# EAGLE board 2LD-17-mk-1.4.2 (EAGLE 7.5.0)
VERSION: v1.4
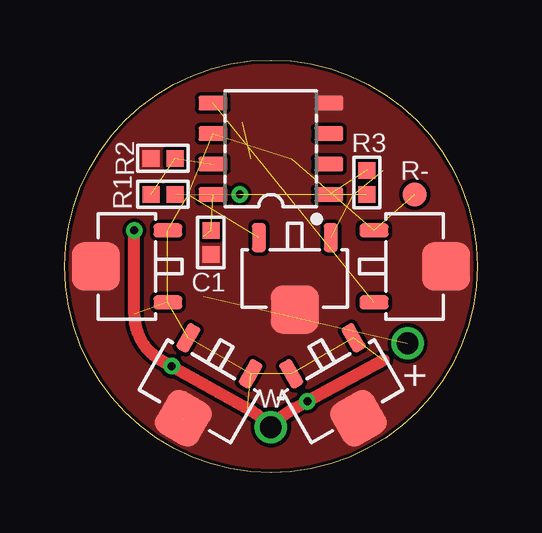
[diagram p0: board, top side]
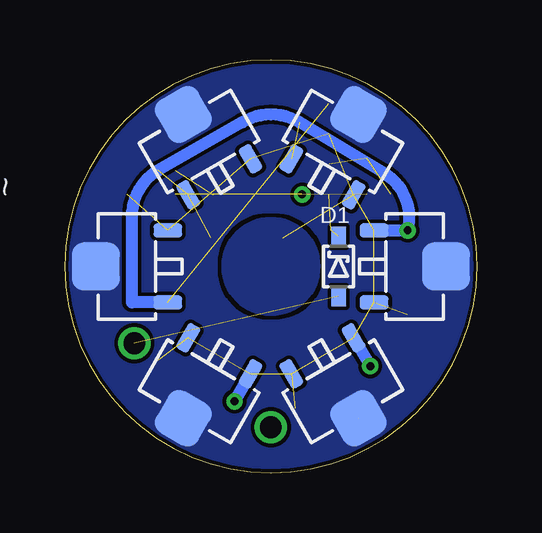
[diagram p1: board, bottom side, seen from below]

Size 17.2 x 17.2 mm. Coordinates in mm from the lower left corner, seen from the top.
Outline: 0,8.6 arc-180 17.2,8.6 arc-180 0,8.6
Copper layers (1*16): Top 0.0356mm / dielectric 1.5011mm / Bottom 0.0356mm
Design rules "LaenPCBOrder2": minimum track width 6mil, minimum drill 13mil, track to track 6mil, track to pad 6mil, pad to pad 6mil, via to via 6mil, smd to smd 6mil, copper to edge 6mil, drill to drill 6mil, minimum pad ring 7mil, minimum via ring 7mil, stop-mask expansion 3mil, vias tented up to drill 20mil, thermal gap 10mil

## Footprints (pad centres in the part's own frame; a part is rotated, then mirrored left to right if it is on the bottom)
1X01-0.9MM-CIR = drill 0.9 pad 1.3: P$1 0,0
C0402 = smd 0.7 x 0.7: 1 -0.5,0; 2 0.5,0
SOD323-SCHOTTKY = smd 0.8 x 0.6: A -1.25,0; C 1.25,0
R0402 = smd 0.7 x 0.7: 1 -0.5,0; 2 0.5,0
1X01-SMD-1MM-DIA-NS = smd 1 x 1: P$1 0,0
SO08-NARROWER = smd 0.6 x 1.2: 1 -1.905,-2.416; 2 -0.635,-2.416; 3 0.635,-2.416; 4 1.905,-2.416; 5 1.905,2.416; 6 0.635,2.416; 7 -0.635,2.416; 8 -1.905,2.416
SOT89-NOTHERM-ROUNDED-LESS = smd 0.58 x 1.2: 1 -1.5,-1.7; 3 1.5,-1.7 | smd 2 x 2: 4 0,1.3

## Placement (x,y rotation side)
+  M011X01-0.9MM-CIR  [1X01-0.9MM-CIR]  14.3,5.4 90 top
C1  1u  [C0402]  6.1,9.6 270 top
D1  BAT165  [SOD323-SCHOTTKY]  5.78,8.6 90 bottom
FRAME1  FRAME-LETTERNO_PACKAGE  [DUMMY]  0.1,0.1 0 top
R1  19K  [R0402]  4.1,11.6 0 top
R2  4K7  [R0402]  4.1,13.1 0 top
R3  10K  [R0402]  12.6,12.1 270 top
R-  M01SMD-1MM-DIA-NS  [1X01-SMD-1MM-DIA-NS]  14.6,11.6 90 top
U1  Tiny25  [SO08-NARROWER]  8.6,13.5 90 top
U2  AMC7135  [SOT89-NOTHERM-ROUNDED-LESS]  2.6,8.6 90 top
U3  AMC7135  [SOT89-NOTHERM-ROUNDED-LESS]  11.6,13.8 30 bottom
U4  AMC7135  [SOT89-NOTHERM-ROUNDED-LESS]  5.6,13.8 330 bottom
U5  AMC7135  [SOT89-NOTHERM-ROUNDED-LESS]  2.6,8.6 270 bottom
U6  AMC7135  [SOT89-NOTHERM-ROUNDED-LESS]  5.6,3.4 210 bottom
U7  AMC7135  [SOT89-NOTHERM-ROUNDED-LESS]  11.6,3.4 150 bottom
U8  AMC7135  [SOT89-NOTHERM-ROUNDED-LESS]  14.6,8.6 90 bottom
U9  AMC7135  [SOT89-NOTHERM-ROUNDED-LESS]  9.6,8.1 180 top
U10  AMC7135  [SOT89-NOTHERM-ROUNDED-LESS]  11.6,3.4 210 top
U11  AMC7135  [SOT89-NOTHERM-ROUNDED-LESS]  5.6,3.4 150 top
U12  AMC7135  [SOT89-NOTHERM-ROUNDED-LESS]  14.6,8.6 270 top
W  M011X01-0.9MM-CIR  [1X01-0.9MM-CIR]  8.6,1.9 270 top

## Library data of the parts
+ C1 D1 R1-R3 R- U1-U12 W = a_parts
FRAME1 = a_parts; DESIGNER: sean@yak.net; VERSION: v1.4

## Nets
3: U1.2
4: U1.3
BATT_DIV: R1.1 R2.2 U1.7
GND: C1.2 R2.1 U1.4 U2.4 U3.4 U4.4 U5.4 U6.4 U7.4 U8.4 U9.4 U10.4 U11.4 U12.4
N$1: R3.1 U1.1
PWM_R: U1.5 U12.3
PWM_W: U1.6 U2.3 U3.3 U4.3 U5.3 U6.3 U7.3 U8.3 U9.3 U10.3 U11.3
RED_K: R-.P$1 U12.1
VBAT: +.P$1 D1.A
VCC: C1.1 D1.C R1.2 R3.2 U1.8
WHITE_K: U2.1 U3.1 U4.1 U5.1 U6.1 U7.1 U8.1 U9.1 U10.1 U11.1 W.P$1

## Tracks (layer width: path | path; a pad name or v marks a point on that pad's centre or on a via)
BATT_DIV  (2 unrouted)
GND  (1 unrouted)
  pour Top (isolate 0.152, rank 6, no thermals): 0.1,8.6 arc90 8.6,0.1 arc90 17.1,8.6 arc90 8.6,17.1 arc90
  pour Bottom (isolate 0.152, rank 6, no thermals): 17.1,8.6 arc-90 8.6,0.1 arc-90 0.1,8.6 arc-90 8.6,17.1 arc-90
N$1  (1 unrouted)
PWM_R  (1 unrouted)
PWM_W  (10 unrouted)
RED_K  (1 unrouted)
VBAT  (1 unrouted)
  pour Bottom (isolate 0.152, no thermals): 6.6,8.6 arc-180 10.6,8.6 arc-180
VCC  (via drill 0.33)  (5 unrouted)
  other vias: 7.3,11.6
WHITE_K  (via drill 0.33)  (6 unrouted)
  Top 0.5: v2.9,10.1 2.9,6.6 arc60 4,4.7 v4.46,4.45 7.6,2.7 arc-19 W.P$1 arc-21 9.6,2.7 v10.12,2.98 13.3,4.7
  Bottom 0.5: U5.1 v2.9,10.1 arc-73 3.9,12.5 7.4,14.6 arc-62 9.8,14.6 13.3,12.6 arc-60 14.4,10.7 14.4,7.1 U8.1 | U6.1 v4.46,4.45 | U7.1 v10.12,2.98

## Text on the board
tPlace: ~
bPlace: ~